# EAGLE board plugV16-Add-Large-Cap-to-support-RELAY-smd-5x5cm-small-pinout-smd (EAGLE 7.6.0)
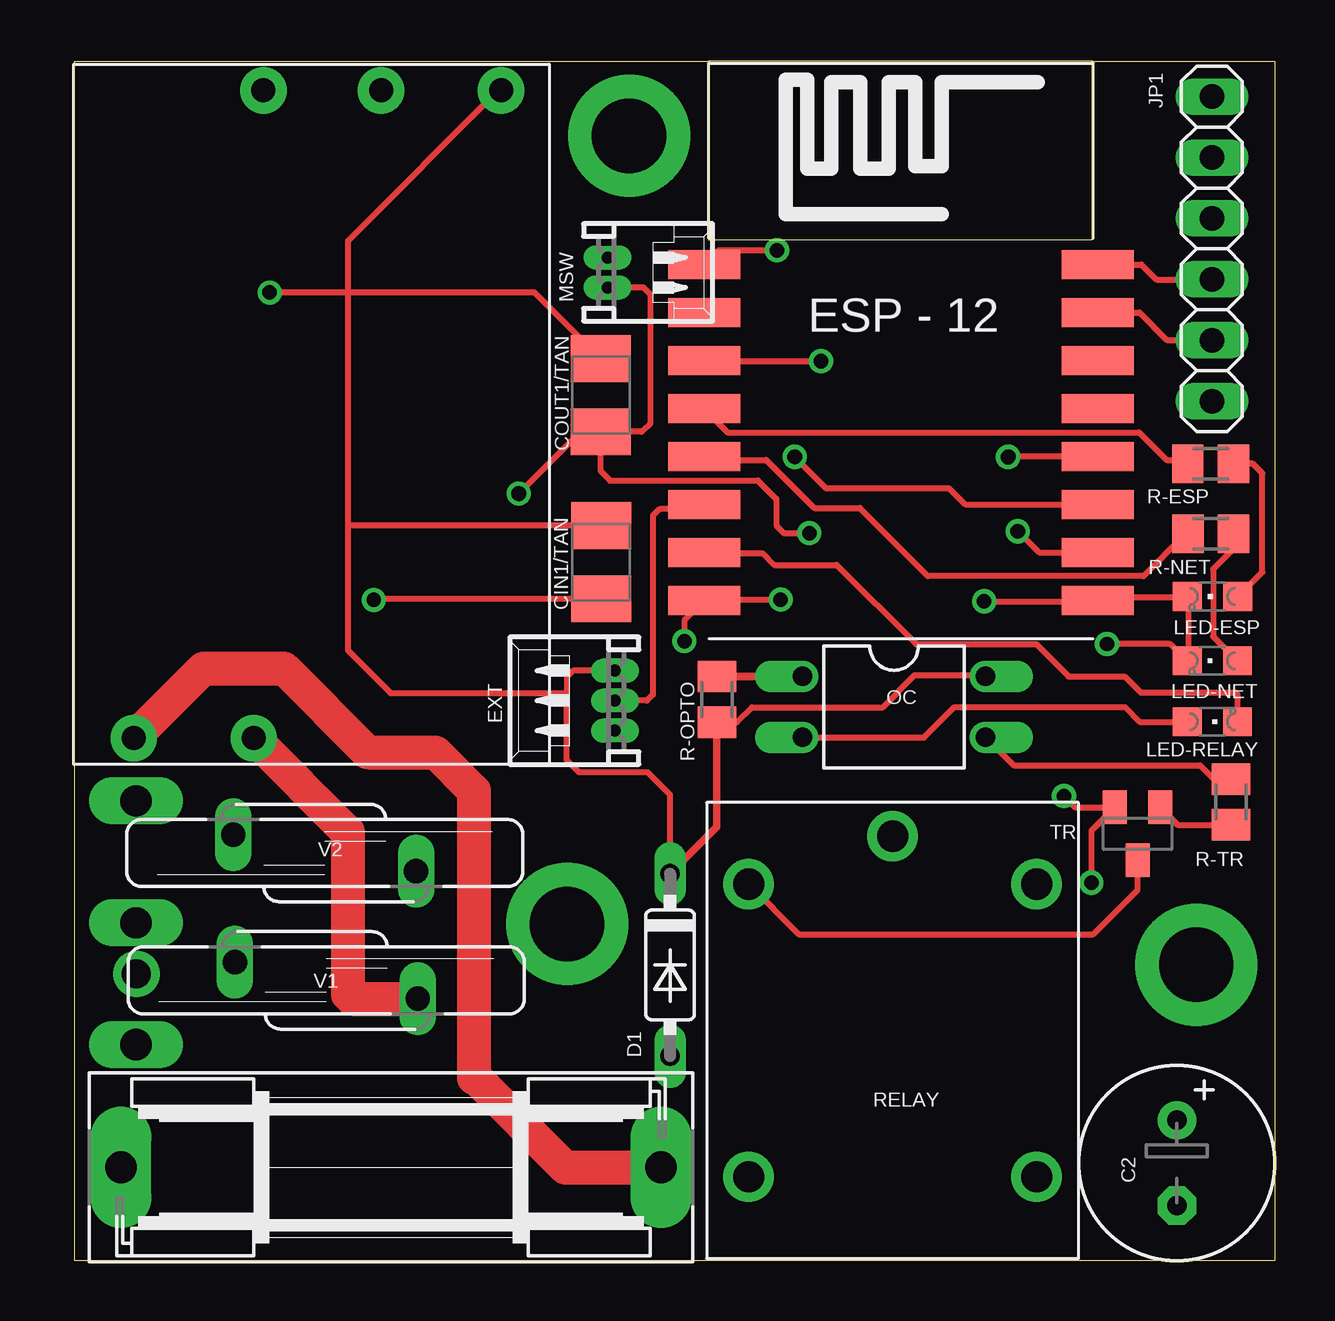
[diagram p0: board, top side]
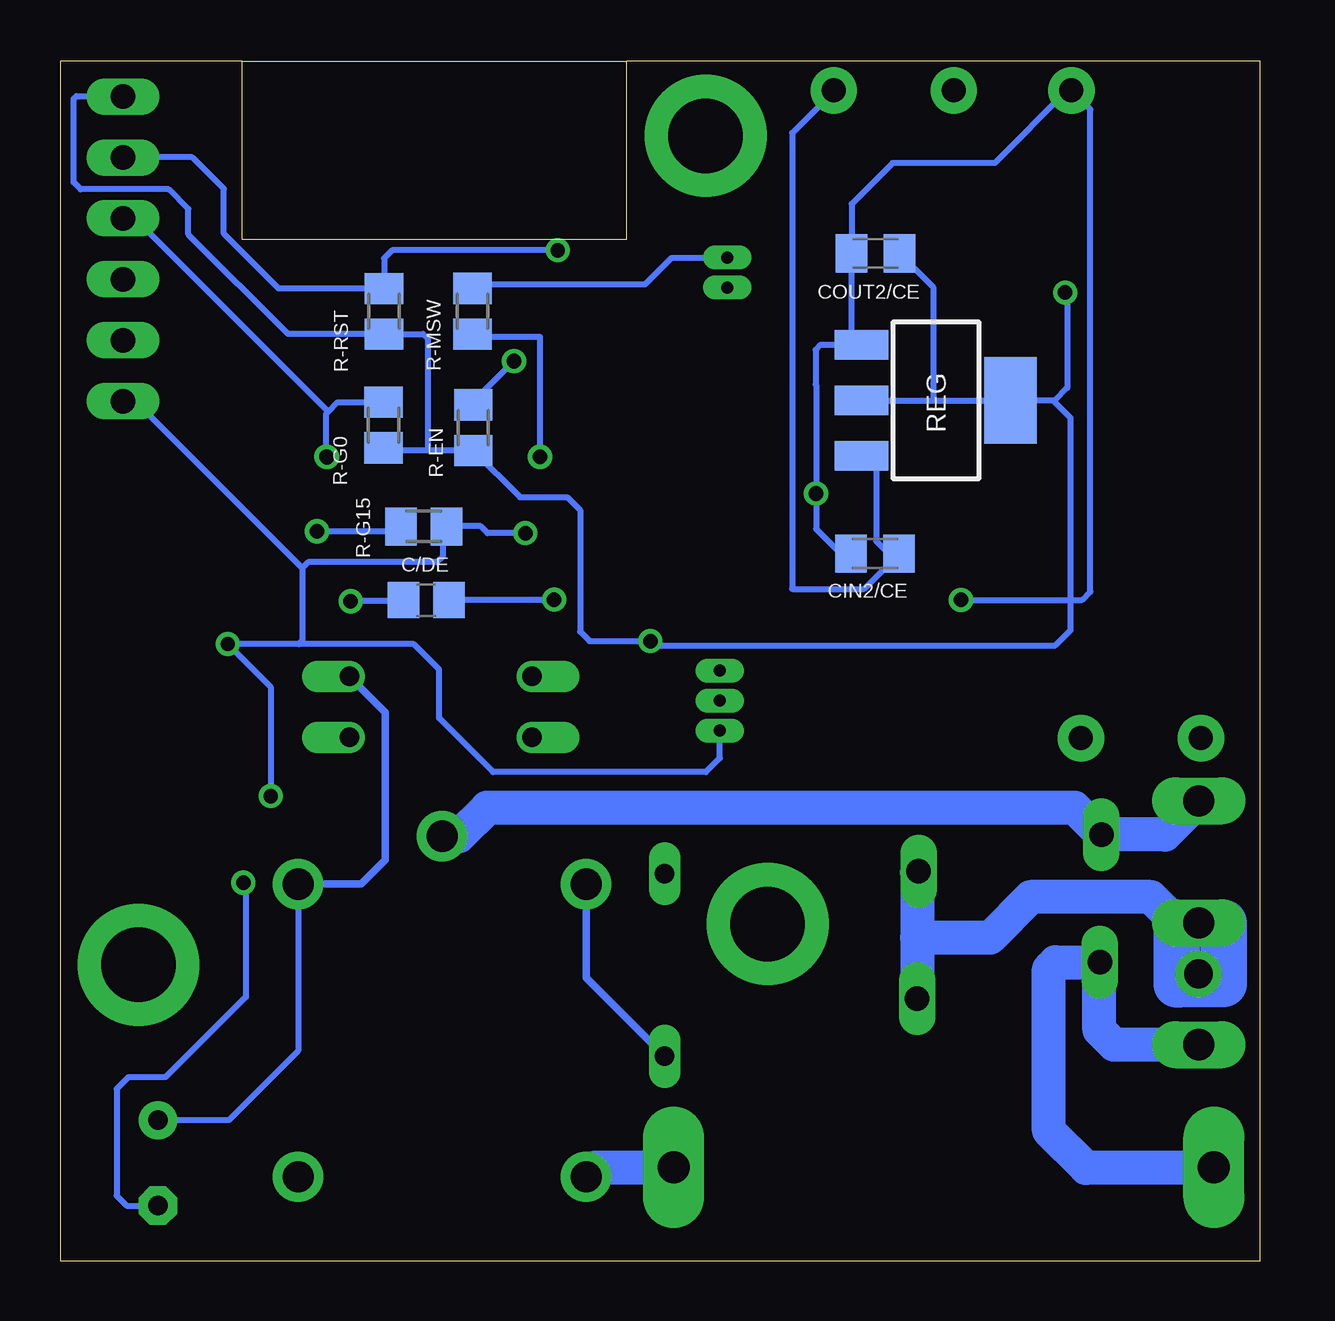
[diagram p1: board, bottom side, seen from below]

Size 50 x 50 mm. Coordinates in mm from the lower left corner, seen from the top.
Outline: 26.4,50 0,50 0,0 50,0 50,50 42.4,50
Outline: 26.4,50 26.4,42.55 42.4,42.55 42.4,50
Outline: 42.4,50 26.4,50
Copper layers (1*16): Top 0.035mm / dielectric 1.5mm / Bottom 0.035mm
Design rules "default": minimum track width 10mil, minimum drill 24mil, track to track 8mil, track to pad 8mil, pad to pad 8mil, via to via 8mil, smd to smd 8mil, copper to edge 40mil, drill to drill 8mil, minimum pad ring 10mil, minimum via ring 8mil, stop-mask expansion 4mil, vias tented up to drill 0mil, thermal gap 10mil

## Footprints (pad centres in the part's own frame; a part is rotated, then mirrored left to right if it is on the bottom)
E3,5-8 = drill 0.813 pad 1.6: + -1.778,0 | drill 0.813 pad 1.6 octagon: - 1.778,0
C0805 = smd 1.3 x 1.5: 1 -0.95,0; 2 0.95,0
B/3528-21R = smd 1.95 x 2.5: + 1.525,0; - -1.525,0
C0805K = smd 1.3 x 1.6: 1 -1,0; 2 1,0
ESP12-SMD = smd 3 x 1.2: ADC -8.3,3.8; CH_PD -8.3,1.8; GND 8.1,-8.2; GPIO0 8.1,-2.2; GPIO2 8.1,-4.2; GPIO4 8.1,1.8; GPIO5 8.1,-0.2; GPIO12 -8.3,-4.2; GPIO13 -8.3,-6.2; GPIO14 -8.3,-2.2; GPIO15 8.1,-6.2; GPIO16 -8.3,-0.2; RESET -8.3,5.8; RXD0 8.1,3.8; TXD0 8.1,5.8; VCC -8.3,-8.2
DO35-7 = drill 0.813 long: A 3.81,0; C -3.81,0
53048-03 = drill 0.5 pad 0.698 long: 1 1.25,-1.25; 2 0,-1.25; 3 -1.25,-1.25
SH22,5 = drill 1.321 pad 2.54 long: 1 -11.252,0; 2 11.252,0
1X06 = drill 1.016 long: 1 -6.35,0; 2 -3.81,0; 3 -1.27,0; 4 1.27,0; 5 3.81,0; 6 6.35,0
CHIPLED_0805 = smd 1.2 x 1.2: A 0,-1.05; C 0,1.05
53048-02 = drill 0.5 pad 0.698 long: 1 0.625,-1.25; 2 -0.625,-1.25
DIL04 = drill 0.813 offset: 1 -1.27,-3.81; 2 1.27,-3.81; 3 1.27,3.81; 4 -1.27,3.81
M0805 = smd 1.3 x 1.6: 1 -0.95,0; 2 0.95,0
SOT-223 = smd 1.219 x 2.235: 1 -2.381,-3.099; 2 -0.07,-3.099; 3 2.241,-3.099 | smd 3.6 x 2.2: 4 -0.07,3.099
RELAY-SONGLE = drill 1.3 pad 2.1: COM -8.1,0; NC 6.1,6; NO 6.1,-6; V+ -6.1,6; V- -6.1,-6
SOT23-BEC = smd 1 x 1.4: B -0.95,-1.1; C 0,1.1; E 0.95,-1.1
POWER-RELAY-FOOTPRINT = drill 1.3 long: COMMON 0,0; LINE -5.08,0; RELAY 5.08,0
POWERSUPPLY-5V-700MA = drill 1 pad 1.93: 5V 13.5,-7.9; AC1 -13.5,7.4; AC2 -13.5,2.4; GND 13.5,2; NONE 13.5,-2.9
S14K11 = drill 1.016 long: 1 -0.762,-3.81; 2 0.762,3.81

## Placement (x,y rotation side)
C2  470-1000uF  [E3,5-8]  45.92,4.07 270 top
C/DE  0.1uF  [C0805]  34.74,27.53 180 bottom
CIN1/TAN  22uF  [B/3528-21R]  21.93,29.11 90 top
CIN2/CE  0.1uF  [C0805K]  16.04,29.47 180 bottom
COUT1/TAN  22uF  [B/3528-21R]  21.92,36.07 90 top
COUT2/CE  0.1uF  [C0805K]  16.02,41.98 180 bottom
CPU  [ESP12-SMD]  34.52,35.71 0 top
D1  1N4148  [DO35-7]  24.81,12.32 270 top
EXT  [53048-03]  21.26,23.34 90 top
F1  FUSESH22,5  [SH22,5]  13.18,3.89 0 top
JP1  [1X06]  47.38,42.17 90 top
LED-ESP  [CHIPLED_0805]  47.41,27.68 90 top
LED-NET  [CHIPLED_0805]  47.4,25 90 top
LED-RELAY  [CHIPLED_0805]  47.4,22.46 270 top
MSW  [53048-02]  23.45,41.19 270 top
OC  PC817  [DIL04]  34.14,23.08 270 top
R-EN  10k  [M0805]  32.78,34.72 90 bottom
R-ESP  470  [M0805]  47.33,33.22 0 top
R-G0  10k  [M0805]  36.52,34.83 90 bottom
R-G15  1k  [M0805]  34.84,30.6 0 bottom
R-MSW  470  [M0805]  32.82,39.57 270 bottom
R-NET  470  [M0805]  47.33,30.29 0 top
R-OPTO  1k  [M0805]  26.75,23.39 270 top
R-RST  10k  [M0805]  36.49,39.57 90 bottom
R-TR  510  [M0805]  48.18,19.12 90 top
REG  [SOT-223]  13.5,35.78 270 bottom
RELAY  [RELAY-SONGLE]  34.08,9.59 270 top
TR  BC817  [SOT23-BEC]  44.28,17.79 180 top
U$1  POWER-RELAY-FOOTPRINT  [POWER-RELAY-FOOTPRINT]  2.55,14.08 90 top
U$4  POWERSUPPLY-5V-700MA  [POWERSUPPLY-5V-700MA]  9.86,35.27 90 top
V1  [S14K11]  10.48,11.68 90 top
V2  [S14K11]  10.41,16.99 270 top

## Library data of the parts
C2 C/DE CIN1/TAN CIN2/CE COUT1/TAN COUT2/CE R-EN R-ESP R-G0 R-G15 R-MSW R-NET R-OPTO R-RST R-TR = rcl
CPU = esp8266modules
D1 = diode
EXT = con-molex; MF: WALDOM/MOLEX; MPN: 53048-0310; OC_FARNELL: 9732918; OC_NEWARK: 38C9908
F1 = fuse; OC_FARNELL: unknown; OC_NEWARK: unknown
JP1 = pinhead
LED-ESP LED-NET LED-RELAY = led
MSW = con-molex; MF: MOLEX; MPN: 53048-0210; OC_FARNELL: 1012259; OC_NEWARK: 57H4718
OC = optocoupler; MPN: PC817X4J000F; OC_FARNELL: 9707727; OC_NEWARK: 97K7059
REG = AMS1117-3.3
RELAY = Seeed-OPL-Relay
TR = transistor-npn
U$1 = Power-Plug-Footprint
U$4 = PowerSupply-5V-700mA
V1 V2 = varistor

## Nets
3V3: C/DE.1 COUT1/TAN.+ COUT2/CE.1 CPU.VCC JP1.6 R-EN.1 R-G0.1 R-RST.1 REG.2 REG.4
+5V: C2.+ CIN1/TAN.+ CIN2/CE.1 D1.C EXT.1 OC.4 R-OPTO.2 REG.3 RELAY.V+ U$4.5V
EN: CPU.CH_PD R-EN.2
G-00: CPU.GPIO0 JP1.4 R-G0.2
G-12: CPU.GPIO12 EXT.2
G-13: CPU.GPIO13 LED-RELAY.C
G-15: CPU.GPIO15 R-G15.1
GND: C2.- C/DE.2 CIN1/TAN.- CIN2/CE.2 COUT1/TAN.- COUT2/CE.2 CPU.GND EXT.3 JP1.1 LED-ESP.C LED-NET.C MSW.1 R-G15.2 REG.1 TR.E U$4.GND
LINE: F1.1 U$1.LINE V1.2
M-SW+: MSW.2 R-MSW.1
N: U$1.COMMON U$4.AC2 V1.1 V2.2
N$1: OC.3 R-TR.2
N$2: R-TR.1 TR.B
N$6: LED-ESP.A R-ESP.2
N$7: CPU.GPIO2 R-MSW.2
N$8: CPU.GPIO14 R-NET.1
N$13: OC.1 R-OPTO.1
N$16: LED-NET.A R-NET.2
N$17: D1.A RELAY.V- TR.C
N$19: CPU.GPIO16 R-ESP.1
N$21: LED-RELAY.A OC.2
RELAY-COM: RELAY.COM U$1.RELAY V2.1
RELAY-NO: F1.2 RELAY.NO U$4.AC1
RST: CPU.RESET JP1.5 R-RST.2
RX: CPU.RXD0 JP1.2
TX: CPU.TXD0 JP1.3

## Tracks (layer width: path | path; a pad name or v marks a point on that pad's centre or on a via)
3V3  (via drill 0.6)
  Top 0.254: v29.41,27.55 26.26,27.55 CPU.VCC 25.4,26.69 v25.4,25.82 | COUT1/TAN.+ 19.16,40.35 v8.12,40.35
  Bottom 0.254: v29.41,27.55 29.43,27.53 C/DE.1 | REG.2 13.62,35.85 | 13.62,35.85 REG.4 8.56,35.85 | COUT2/CE.1 13.62,40.58 13.62,35.85 | v8.12,40.35 8.03,40.26 8.03,36.38 8.56,35.85 | 8.56,35.85 8.56,35.79 7.89,35.12 7.89,26.28 8.53,25.64 25.22,25.64 v25.4,25.82 27.93,25.82 28.33,26.22 28.33,31.28 28.87,31.82 30.83,31.82 R-EN.1 34.71,33.77 | 34.71,33.77 36.41,33.77 R-G0.1 | 34.71,33.77 34.68,33.8 34.68,38.42 34.88,38.62 R-RST.1 40.5,38.62 44.65,42.77 44.65,43.83 45.47,44.65 49.14,44.65 49.43,44.94 49.43,48.42 49.31,48.54 47.4,48.54 JP1.6
+5V
  Top 0.254: R-OPTO.2 27.6,22.44 28.22,23.06 33.67,23.06 35.01,24.4 37.9,24.4 OC.4 | U$4.5V 17.65,48.77 11.38,42.5 11.38,30.6 | 11.38,30.6 11.38,25.44 13.16,23.66 20.31,23.66 | 20.31,23.66 20.51,23.66 20.51,24.32 20.78,24.59 EXT.1 | CIN1/TAN.+ 11.41,30.64 11.38,30.6 | D1.C 24.81,19.41 23.87,20.35 21.02,20.35 20.5,20.87 20.5,23.47 20.31,23.66
  Top 0.305: D1.C 26.75,18.08 R-OPTO.2
  Bottom 0.254: REG.3 16.5,33.5 16,33 16,30 15.5,29.5 CIN2/CE.1 15.5,29 16.5,28 19.5,28 19.5,47 18,48.5 U$4.5V | RELAY.V+ 40.08,8.74 42.97,5.85 C2.+
  Bottom 0.305: OC.4 36.44,22.84 36.44,16.7 37.45,15.69 RELAY.V+
EN  (via drill 0.61)
  Top 0.254: v31.09,37.49 26.29,37.49 CPU.CH_PD
  Bottom 0.254: v31.09,37.49 32.69,35.89 R-EN.2
G-00  (via drill 0.6, 0.61)
  Top 0.254: CPU.GPIO0 v38.9,33.51 v38.88,33.49
  Bottom 0.254: v38.9,33.51 38.9,35.32 38.83,35.4 | 38.83,35.4 38.44,35.78 R-G0.2 | 38.83,35.4 46.86,43.43 47.32,43.43 JP1.4
G-12
  Top 0.254: CPU.GPIO12 26.06,31.32 24.36,31.32 24.09,31.05 24.09,23.59 23.84,23.34 EXT.2
G-13
  Top 0.254: LED-RELAY.C 48.44,23.6 48.37,23.67 44.42,23.67 43.75,24.34 41.41,24.34 40.06,25.69 35.06,25.69 31.75,29 29.15,29 28.66,29.49 26.29,29.49 CPU.GPIO13
G-15  (via drill 0.61)
  Top 0.254: v39.29,30.4 40.18,29.51 CPU.GPIO15
  Bottom 0.254: v39.29,30.4 35.89,30.4 R-G15.1
GND  (via drill 0.6, 0.61)
  Top 0.254: 21.95,34.52 COUT1/TAN.- | v42.36,15.75 42.36,17.92 TR.E 41.69,18.89 v41.22,19.36 | v43.01,25.7 45.65,25.7 LED-NET.C 46.41,25.15 46.41,27.66 LED-ESP.C 46.18,27.66 42.75,27.66 CPU.GND 42.59,27.48 v37.89,27.48 | CIN1/TAN.- 12.51,27.59 v12.46,27.54 | v30.61,30.32 29.55,30.32 29.23,30.64 29.23,31.75 28.46,32.52 22.32,32.52 22.31,32.51 21.92,32.9 COUT1/TAN.- | COUT1/TAN.- 21.07,34.55 v18.5,31.97 | COUT1/TAN.- 23.62,34.55 23.99,34.91 23.99,40.27 23.7,40.56 MSW.1
  Bottom 0.254: 35.66,27.66 C/DE.2 35.5,27.5 37.87,27.5 v37.89,27.48 | v42.36,15.75 42.26,15.65 42.26,10.99 45.61,7.64 47.15,7.64 47.64,7.15 47.64,2.71 47.22,2.29 C2.- | v41.22,19.36 41.22,23.91 v43.01,25.7 40.05,25.7 | CIN2/CE.2 17.5,29.5 18.5,30.5 v18.5,31.97 18.5,36.5 18.52,36.52 18.52,37.96 18.32,38.16 REG.1 17.02,38.59 COUT2/CE.2 | 17,42 COUT2/CE.2 | v12.46,27.54 7.41,27.54 7.07,27.88 7.07,47.98 U$4.GND 8.03,48.77 11.05,45.75 15.31,45.75 17.02,44.04 COUT2/CE.2 | 40.05,25.7 35.26,25.7 34.2,24.64 34.2,22.61 31.95,20.36 23.09,20.36 22.51,20.94 EXT.3 | 39.91,28.86 39.66,29.11 34.3,29.11 34.06,29.35 34.06,30.4 R-G15.2 33.88,30.61 32.47,30.61 32.18,30.32 v30.61,30.32 | JP1.1 46.87,35.82 39.91,28.86 | 39.91,28.86 39.91,25.84 40.05,25.7
LINE
  Bottom 1.422: U$1.LINE 6.08,9 6.69,9.61 6.69,12.42 V1.2 6.68,12.43 8.52,12.43 8.8,12.15 8.8,5.41 7.25,3.86 1.96,3.86 F1.1
M-SW+
  Bottom 0.254: R-MSW.1 32.69,40.69 25.62,40.69 24.51,41.8 22.21,41.8 MSW.2
N
  Top 1.422: U$4.AC2 11.38,17.86 11.38,11.1 11.56,10.92 V1.1
  Bottom 0.254: V2.2 14.17,16.23 14.29,16.16
  Bottom 1.422: 14.29,16.16 14.29,13.46 | 14.29,13.46 V1.1 | 3.47,14.07 4.55,15.15 9.56,15.15 11.25,13.46 14.29,13.46
  Bottom 1.93: U$1.COMMON 1.51,14.08 1.51,11.54 3.37,11.54 3.37,11.51 3.47,11.51 3.47,14.07
N$1
  Top 0.254: OC.3 39.12,20.64 46.89,20.64 47.46,20.07 R-TR.2
N$2
  Top 0.254: TR.B 45.96,18.17 R-TR.1
N$3  (via drill 3.1 pad 5.08)
  other vias: 20.52,14.03
N$6
  Top 0.254: LED-ESP.A 49.48,28.7 49.48,32.82 49.08,33.22 R-ESP.2
N$7  (via drill 0.61)
  Top 0.254: v30,33.5 31.3,32.2 36.42,32.2 37.11,31.51 CPU.GPIO2
  Bottom 0.254: v30,33.5 30,38.5 32.5,38.5 R-MSW.2
N$8
  Top 0.254: R-NET.1 46.18,30.18 44.53,28.53 35.55,28.53 32.71,31.37 30.81,31.37 28.8,33.38 26.29,33.38 CPU.GPIO14
N$9  (via drill 3.1 pad 5.08)
  other vias: 46.73,12.33
N$13
  Top 0.305: R-OPTO.1 26.77,24.35 OC.1
N$16
  Top 0.254: R-NET.2 48.28,29.67 47.43,28.82 47.43,26.02 LED-NET.A
N$17
  Top 0.254: RELAY.V- 30.17,13.6 42.43,13.6 44.28,15.45 TR.C
  Bottom 0.305: D1.A 28.08,11.79 RELAY.V-
N$18  (via drill 3.1 pad 5.08)
  other vias: 23.1,46.88
N$19
  Top 0.254: R-ESP.1 46.18,33.38 45.49,33.38 44.35,34.52 27.2,34.52 26.29,35.43 CPU.GPIO16
N$20  (via drill 1.2 pad 1.93)
  other vias: 2.57,11.95
N$21
  Top 0.254: OC.2 35.38,21.8 36.65,23.07 43.77,23.07 44.38,22.46 LED-RELAY.A
RELAY-COM
  Bottom 1.422: U$1.RELAY 3.96,17.75 V2.1 7.72,18.87 32.2,18.87 33.38,17.69 RELAY.COM
RELAY-NO
  Top 1.422: U$4.AC1 5.36,24.67 8.72,24.67 12.19,21.2 12.32,21.2 12.35,21.17 15.04,21.17 16.63,19.58 16.63,7.61 16.7,7.61 20.44,3.87 20.46,3.89 F1.2
  Bottom 1.422: RELAY.NO 27.68,3.89 F1.2
RST  (via drill 0.6)
  Top 0.254: CPU.RESET 26.82,42.11 v29.26,42.11
  Bottom 0.254: JP1.5 44.49,45.99 43.17,44.67 43.17,42.8 40.89,40.52 R-RST.2 36.49,41.77 36.16,42.11 v29.26,42.11
RX
  Top 0.254: CPU.RXD0 44.37,39.51 45.51,38.37 JP1.2
TX
  Top 0.254: CPU.TXD0 44.45,41.51 45.07,40.89 JP1.3